# EAGLE board PREAMP_PCB_2 (EAGLE 6.3), part 1 of 2
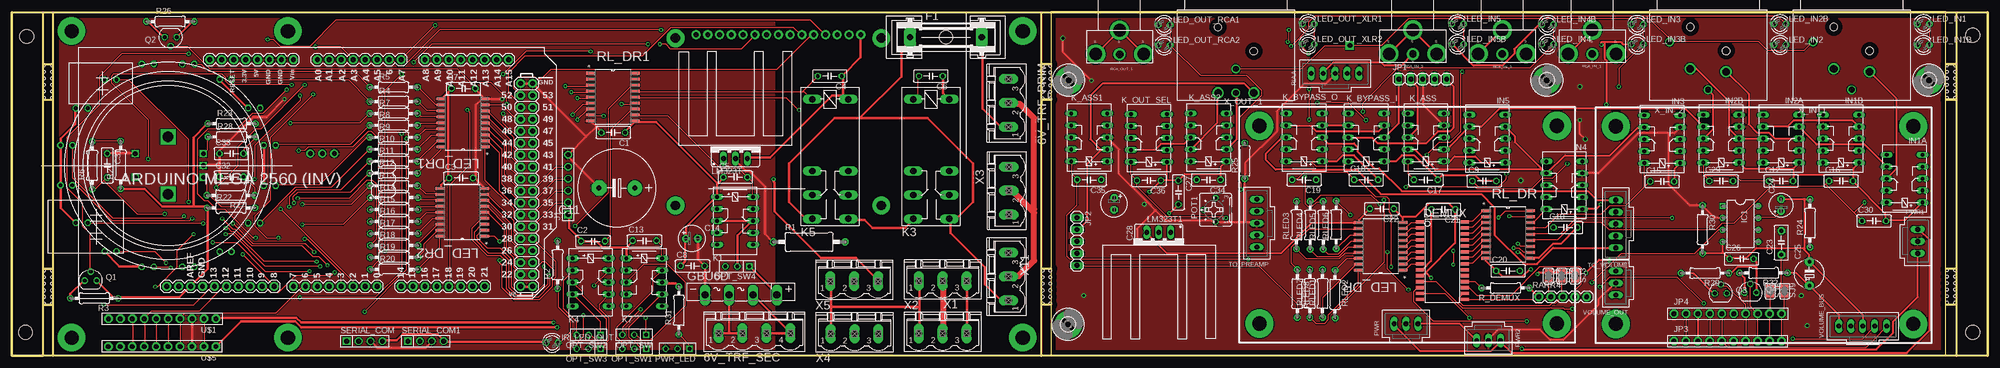
[diagram p0: board, top side]
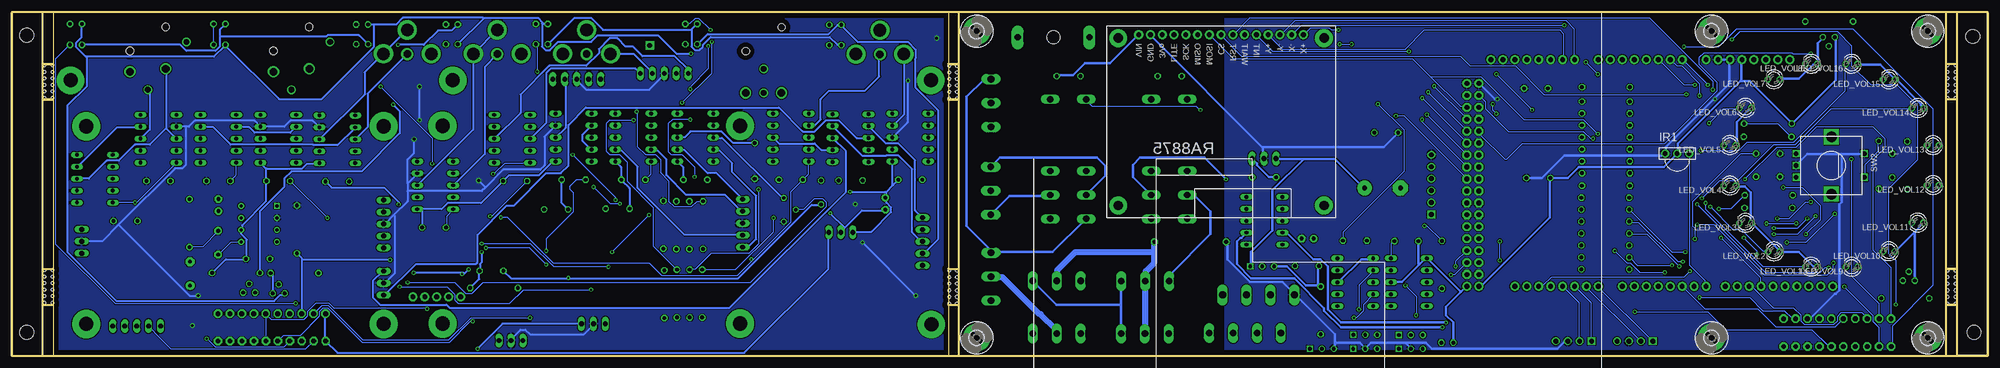
[diagram p1: board, bottom side, seen from below]

Size 419.74 x 73.2 mm. Coordinates in mm from the lower left corner, seen from the top.
Outline: 220.79,0.05 410.87,0.05
Outline: 410.87,0.05 410.87,73.2
Outline: 410.87,73.2 220.79,73.2
Outline: 220.79,73.2 220.79,0.05
Outline: 0,73.02 0,0
Outline: 419.74,0 419.74,73.02
Outline: 220.79,0.05 410.87,0.05
Outline: 410.87,0.05 410.87,73.2
Outline: 410.87,73.2 220.79,73.2
Outline: 220.79,73.2 220.79,0.05
Outline: 6.6,73.02 6.6,62.1
Outline: 6.6,62.1 6.6,54.48
Outline: 6.6,54.48 6.6,18.54
Outline: 6.6,18.54 6.6,10.92
Outline: 6.6,10.92 6.6,0 0,0
Outline: 6.6,62.1 8.76,62.1
Outline: 6.6,54.48 8.76,54.48
Outline: 6.6,18.54 8.76,18.54 6.6,18.54
Outline: 6.6,10.92 8.76,10.92 6.6,10.92
Outline: 413.13,62.1 410.97,62.1 413.13,62.1
Outline: 413.13,54.48 410.97,54.48 413.13,54.48
Outline: 413.13,10.92 410.97,10.92 413.13,10.92
Outline: 413.13,18.54 410.97,18.54 413.13,18.54
Outline: 419.74,0 413.13,0 413.13,10.92
Outline: 413.13,10.92 413.13,18.54
Outline: 413.13,18.54 413.13,54.48
Outline: 413.13,54.48 413.13,62.1
Outline: 413.13,62.1 413.13,73.02
Outline: 419.74,0 419.74,73.15 0,73.15 0,0
Outline: 419.74,0 0,0
Outline: 218.65,0 8.76,0 8.76,73.08 218.65,73.08 218.65,0
Outline: 218.69,62.1 220.85,62.1 218.69,62.1
Outline: 218.69,54.48 220.85,54.48 218.69,54.48
Outline: 220.85,10.92 218.69,10.92 220.85,10.92
Outline: 220.85,18.54 218.69,18.54 220.85,18.54
Copper layers (1*16): Top 0.035mm / dielectric 1.5mm / Bottom 0.035mm
Design rules "default *": minimum track width 10mil, minimum drill 0.4mm, track to track 8mil, track to pad 8mil, pad to pad 8mil, via to via 8mil, smd to smd 8mil, copper to edge 40mil, drill to drill 8mil, minimum pad ring 10mil, minimum via ring 8mil, stop-mask expansion 4mil, vias tented up to drill 0mil, thermal gap 10mil
Net classes: 0 default: width 0.203 mm, clearance 0.203 mm; 1 mains: width 0.508 mm, clearance 2.5 mm; 2 earth: width 1.27 mm, clearance 0.508 mm; 3 main2: width 0.508 mm, clearance 1.5 mm; 4 power: width 0.381 mm, clearance 0.203 mm
Holes 3 mm at 3.17,67.94 2.92,5.08 416.56,5.08 416.56,68.2
Holes 0.6 mm at 8.51,61.85 8.51,60.45 8.51,59.05 8.51,57.66 8.51,56.26 8.51,54.86 6.86,54.86 6.86,56.26 6.86,57.66 6.86,59.05 6.86,60.45 6.86,61.85 8.51,18.16 8.51,16.76 8.51,15.37 8.51,13.97 8.51,12.57 8.51,11.18 6.86,11.18 6.86,12.57 6.86,13.97 6.86,15.37 6.86,16.76 6.86,18.16 218.95,54.74 218.95,56.13 218.95,57.53 218.95,58.93 218.95,60.33 218.95,61.72 220.6,61.72 220.6,60.33 220.6,58.93 220.6,57.53 220.6,56.13 220.6,54.74 220.6,18.16 220.6,16.76 220.6,15.37 220.6,13.97 220.6,12.57 220.6,11.18 218.95,11.18 218.95,12.57 218.95,13.97 218.95,15.37 218.95,16.76 218.95,18.16 411.1,54.86 411.1,56.26 411.1,57.66 411.1,59.05 411.1,60.45 411.1,61.85 412.75,61.85 412.75,60.45 412.75,59.05 412.75,57.66 412.75,56.26 412.75,54.86 412.75,18.29 412.75,16.89 412.75,15.49 412.75,14.1 412.75,12.7 412.75,11.3 411.1,11.3 411.1,12.7 411.1,14.1 411.1,15.49 411.1,16.89 411.1,18.29

## Footprints (pad centres in the part's own frame; a part is rotated, then mirrored left to right if it is on the bottom)
MSTBV3 = drill 1.397 long: 1 -5.08,0; 2 0,0; 3 5.08,0
MSTBV4 = drill 1.397 long: 1 -7.62,0; 2 -2.54,0; 3 2.54,0; 4 7.62,0
C050-025X075 = drill 0.813 octagon: 1 -2.54,0; 2 2.54,0
E7,5-16 = drill 1.016 pad 3.15: + -3.81,0 | drill 1.016 pad 3.15 octagon: - 3.81,0
E2,5-6 = drill 0.813 pad 1.6: + -1.27,0 | drill 0.813 pad 1.6 octagon: - 1.27,0
C5B3 = drill 0.813 pad 1.6 octagon: 1 -2.54,0; 2 2.54,0
E2,5-5 = drill 0.813 pad 1.6: + -1.27,0 | drill 0.813 pad 1.6 octagon: - 1.27,0
E5-6 = drill 0.813 pad 1.905: + -2.54,0 | drill 0.813 pad 1.905 octagon: - 2.54,0
SO28W = smd 0.65 x 1.7: 1 -7.62,-4.78; 2 -6.35,-4.78; 3 -5.08,-4.78; 4 -3.81,-4.78; 5 -2.54,-4.78; 6 -1.27,-4.78; 7 0,-4.78; 8 1.27,-4.78; 9 2.54,-4.78; 10 3.81,-4.78; 11 5.08,-4.78; 12 6.35,-4.78; 13 7.62,-4.78; 14 8.89,-4.78; 15 8.89,4.78; 16 7.62,4.78; 17 6.35,4.78; 18 5.08,4.78; 19 3.81,4.78; 20 2.54,4.78; 21 1.27,4.78; 22 0,4.78; 23 -1.27,4.78; 24 -2.54,4.78; 25 -3.81,4.78; 26 -5.08,4.78; 27 -6.35,4.78; 28 -7.62,4.78
GSH15 = drill 1.321 pad 2.54 long: 1 -7.62,0; 2 7.62,0 | hole 2.794: 0,0
GBU4S = drill 1.499 long: + 7.62,0; - -7.62,0; AC1 2.54,0; AC2 -2.54,0
3,0-PAD = drill 3 pad 5.842: B3,0 0,0
DIL08 = drill 0.7 square: 1 -3.81,-3.81 | drill 0.7: 2 -1.27,-3.81; 3 1.27,-3.81; 4 3.81,-3.81; 5 3.81,3.81; 6 1.27,3.81; 7 -1.27,3.81; 8 -3.81,3.81
G6H2-100 = drill 0.813 long: 1 -5.08,-3.81; 5 5.08,-3.81; 6 5.08,3.81; 10 -5.08,3.81; O1 -2.54,-3.81; O2 -2.54,3.81; P1 0,-3.81; P2 0,3.81; S1 2.54,-3.81; S2 2.54,3.81
TSOP17_TB1 = drill 1 pad 1.676: GND 0,-3.81; VO 0,1.27; VS 0,-1.27
LED3MM = drill 0.813 octagon: A -1.27,0; K 1.27,0
M1X6 = drill 1.02 pad 1.632 square: 1 0,0 | drill 1.02 pad 1.632: 2 2.54,0; 3 5.08,0; 4 7.62,0; 5 10.16,0; 6 12.7,0
1X05 = drill 1.016 long: 1 -5.08,0; 2 -2.54,0; 3 0,0; 4 2.54,0; 5 5.08,0
1X10-BIG = drill 1.016 pad 1.778 octagon: 1 -11.43,0; 2 -8.89,0; 3 -6.35,0; 4 -3.81,0; 5 -1.27,0; 6 1.27,0; 7 3.81,0; 8 6.35,0; 9 8.89,0; 10 11.43,0
F4052 = drill 1.321 long: 1 -3.81,3.81; 2 -3.81,-3.81; O1 11.43,-3.81; O2 11.43,3.81; P1 16.51,-3.81; P2 16.51,3.81; S1 21.59,-3.81; S2 21.59,3.81
SOIC127P1030X265-18N = smd 1.981 x 0.559: 1 -4.674,5.08; 2 -4.674,3.81; 3 -4.674,2.54; 4 -4.674,1.27; 5 -4.674,0; 6 -4.674,-1.27; 7 -4.674,-2.54; 8 -4.674,-3.81; 9 -4.674,-5.08; 10 4.674,-5.08; 11 4.674,-3.81; 12 4.674,-2.54; 13 4.674,-1.27; 14 4.674,0; 15 4.674,1.27; 16 4.674,2.54; 17 4.674,3.81; 18 4.674,5.08
TO220S = drill 1.016 long: 1 -2.54,-2.54; 2 0,-2.54; 3 2.54,-2.54
M1X3 = drill 0.8 square: 1 0,0 | drill 0.8: 2 2.54,0; 3 5.08,0
ARDUINO_MEGA2560_INV = drill 1.016 pad 1.88: 0 63.5,2.54; 1 60.96,2.54; 2 58.42,2.54; 3 55.88,2.54; 3.3V 35.56,50.8; 4 53.34,2.54; 5 50.8,2.54; 5V 38.1,50.8; 5V. 93.98,2.54; 5V.. 96.52,2.54; 6 48.26,2.54; 7 45.72,2.54; 8 41.656,2.54; 9 39.116,2.54; 10 36.576,2.54; 11 34.036,2.54; 12 31.496,2.54; 13 28.956,2.54; 14 68.58,2.54; 15 71.12,2.54; 16 73.66,2.54; 17 76.2,2.54; 18 78.74,2.54; 19 81.28,2.54; 20 83.82,2.54; 21 86.36,2.54; A0 50.8,50.8; A1 53.34,50.8; A2 55.88,50.8; A3 58.42,50.8; A4 60.96,50.8; A5 63.5,50.8; A6 66.04,50.8; A7 68.58,50.8; A8 73.66,50.8; A9 76.2,50.8; A10 78.74,50.8; A11 81.28,50.8; A12 83.82,50.8; A13 86.36,50.8; A14 88.9,50.8; A15 91.44,50.8; AREF 23.876,2.54; GND 26.416,2.54; GND. 43.18,50.8; GND.. 40.64,50.8; GND... 93.98,45.72; GND.... 96.52,45.72; I/OREF 30.48,50.8; N/C 27.94,50.8; RESET 33.02,50.8; SCL1 18.796,2.54; SDA1 21.336,2.54; VIN 45.72,50.8 | drill 1.016 pad 1.88 octagon: 22 93.98,5.08; 23 96.52,5.08; 24 93.98,7.62; 25 96.52,7.62; 26 93.98,10.16; 27 96.52,10.16; 28 93.98,12.7; 29 96.52,12.7; 30 93.98,15.24; 31 96.52,15.24; 32 93.98,17.78; 33 96.52,17.78; 34 93.98,20.32; 35 96.52,20.32; 36 93.98,22.86; 37 96.52,22.86; 38 93.98,25.4; 39 96.52,25.4; 40 93.98,27.94; 41 96.52,27.94; 42 93.98,30.48; 43 96.52,30.48; 44 93.98,33.02; 45 96.52,33.02; 46 93.98,35.56; 47 96.52,35.56; 48 93.98,38.1; 49 96.52,38.1; 50 93.98,40.64; 51 96.52,40.64; 52 93.98,43.18; 53 96.52,43.18
B25P = drill 0.7 octagon: 1 -2.54,0; 2 0,2.54; 3 2.54,0
70543-03 = drill 1.016 long: 1 -2.54,0; 2 0,0; 3 2.54,0
SOT54E = drill 0.813 octagon: D -1.27,0; G 0,1.905; S 1.27,0
0411/15 = drill 0.914 octagon: 1 -7.62,0; 2 7.62,0
0207/10 = drill 0.813 octagon: 1 -5.08,0; 2 5.08,0
0207/7 = drill 0.813 octagon: 1 -3.81,0; 2 3.81,0
RTH025W = drill 0.813 octagon: 1 -5.08,0; 2 5.08,0
1X05' = drill 1.016 pad 1.88: 1 0,0; 2 2.54,0; 3 5.08,0; 4 7.62,0; 5 10.16,0
MONO_JACK = drill 2.667 pad 4.064: SLEEVE 7.62,0; SLEEVE1 -2.54,0; SLEEVE2 2.54,-5.08 | drill 1.575 pad 2.54: TIP 2.54,0.064
70543-05 = drill 1.016 long: 1 -5.08,0; 2 -2.54,0; 3 0,0; 4 2.54,0; 5 5.08,0
M1X4 = drill 1.02 pad 1.632 square: 1 0,0 | drill 1.02 pad 1.632: 2 2.54,0; 3 5.08,0; 4 7.62,0
SJ = smd 1.168 x 1.6: 1 -0.762,0; 2 0.762,0
ALPS_EC12E_SW = drill 1 square: A -2.5,-7.5; B 2.5,-7.5; C 0,-7.5; D -2.5,7; E 2.5,7 | drill 2.2 square: GND1 -6.1,0; GND2 6.1,0
CON_PAD_SQUARE_1.02MM = drill 1.02 pad 1.81 square: P 0,0
RA8875 = drill 1 pad 1.93: 3VO 11.85,1.8; CS 24.35,1.8; GND 9.35,1.8; INT 31.85,1.8; LITE 14.35,1.8; MISO 19.35,1.8; MOSI 21.85,1.8; RST 26.85,1.8; SCK 16.85,1.8; VIN 6.85,1.8; WAIT 29.35,1.8; X+ 41.85,1.8; X- 39.35,1.8; Y+ 34.35,1.8; Y- 36.85,1.8 | drill 2 pad 3.81: P$1 2.5,2.5; P$2 46.2,2.5; P$3 2.5,38.1; P$4 46.2,38.1
UGS = drill 3 pad 6: P$1 23.165,-12.497; P$2 23.19,29.54; P$3 -40.005,29.54; P$4 -40.005,-12.497
NC3FAH2 = drill 1.6: 1 -3.81,0.635; 2 3.81,0 | drill 1.2: 3 0,-3.815; G -8.25,6.355 | hole 1.6: -3.81,9.525; 3.81,4.445
NC3MBH = drill 1.6: 1 3.81,0; 2 -3.81,0 | drill 1.2: 3 0,0; G 0,5.08 | hole 1.6: -3.81,13.97; 3.81,8.89

## Placement (x,y rotation side)
6V_TRF_PRIM  5V_TRF_PRIM  [MSTBV3]  211.73,53.8 90 top
6V_TRF_SEC  6V_TRF_SEC  [MSTBV4]  157.77,4.86 0 top
C1  100n  [C050-025X075]  127.76,47.5 180 top
C2  100n  [C050-025X075]  123.47,24.41 0 top
C3  100n  [C050-025X075]  95.44,37.85 0 top
C4  100n  [C050-025X075]  173.77,59.53 180 top
C5  100n  [C050-025X075]  153.69,38.02 0 top
C6  100n  [C050-025X075]  195.23,59.53 180 top
C7  100n  [C050-025X075]  95.95,56.9 0 top
C8  100n  [C050-025X075]  144.61,19.13 0 top
C9  100n  [C050-025X075]  312.8,37.21 0 top
C10  100n  [C050-025X075]  330.04,27.31 0 top
C11  4700µ  [E7,5-16]  128.54,35.72 180 top
C12  100n  [C050-025X075]  375.85,37.21 0 top
C13  100n  [C050-025X075]  134.41,24.51 0 top
C14  470µ  [E2,5-6]  144.46,24.98 0 top
C15  100n  [C050-025X075]  350.58,37.09 0 top
C16  100n  [C050-025X075]  388.58,37.21 0 top
C17  100n  [C050-025X075]  300.38,37.47 180 top
C18  100n  [C050-025X075]  287.71,37.47 0 top
C19  100n  [C050-025X075]  274.53,37.47 180 top
C20  100n  [C050-025X075]  317.83,18.1 0 top
C21  100n  [C050-025X075]  304.11,31.18 180 top
C22  100n  [C050-025X075]  291.03,31.31 180 top
C23  47nF  [C5B3]  375.9,24.09 90 top
C24  1µF  [E2,5-5]  375.85,32.09 90 top
C25  100µF  [E5-6]  381.87,17.5 90 top
C26  100n  [C050-025X075]  367.45,20.66 0 top
C27  100n  [C050-025X075]  247.82,34.77 270 top
C28  470µ  [E2,5-6]  234.17,32.38 270 top
C29  100n  [C050-025X075]  363.12,37.21 0 top
C30  100n  [C050-025X075]  395.59,28.7 0 top
C31  100n  [C050-025X075]  20.27,40.51 270 top
C32  100n  [C050-025X075]  46.67,38.11 0 top
C33  100n  [C050-025X075]  46.67,43.03 0 top
C34  100n  [C050-025X075]  254.24,37.47 180 top
C35  100n  [C050-025X075]  228.87,37.47 180 top
C36  100n  [C050-025X075]  241.55,37.34 180 top
DEMUX  23S17  [SO28W]  303.86,20.89 270 top
F1  300mA  [GSH15]  198.44,67.77 0 top
GBU6D  6A  [GBU4S]  154.89,12.98 0 top
H1  MOUNT-PAD-ROUND3.0  [3,0-PAD]  214.76,69.09 0 bottom
H2  MOUNT-PAD-ROUND3.0  [3,0-PAD]  224.37,6.73 0 top
H3  MOUNT-PAD-ROUND3.0  [3,0-PAD]  12.73,69.09 0 bottom
H5  MOUNT-PAD-ROUND3.0  [3,0-PAD]  326.05,58.62 0 top
H6  MOUNT-PAD-ROUND3.0  [3,0-PAD]  58.67,3.87 0 bottom
H7  MOUNT-PAD-ROUND3.0  [3,0-PAD]  214.76,3.87 0 bottom
H8  MOUNT-PAD-ROUND3.0  [3,0-PAD]  58.67,69.09 0 bottom
H9  MOUNT-PAD-ROUND3.0  [3,0-PAD]  12.73,3.87 0 bottom
H11  MOUNT-PAD-ROUND3.0  [3,0-PAD]  407.24,58.64 0 top
H15  MOUNT-PAD-ROUND3.0  [3,0-PAD]  224.5,58.62 0 top
IC1  LM386  [DIL08]  367.2,28.09 270 top
IN1A  IN1A  [G6H2-100]  402.07,37.7 90 top
IN1B  IN1B  [G6H2-100]  388.58,46.21 90 top
IN2A  IN2A  [G6H2-100]  375.85,46.21 90 top
IN2B  IN2B  [G6H2-100]  363.12,46.21 90 top
IN3  IN3  [G6H2-100]  350.58,46.09 90 top
IN4  IN4  [G6H2-100]  329.78,36.31 90 top
IN5  IN5  [G6H2-100]  313.43,46.21 90 top
IR1  IR  [TSOP17_TB1]  64.7,43.07 270 bottom
IR_LED_OUT  IR out  [LED3MM]  114.79,2.84 0 top
J1  CON_HEADER_1X06-PTH  [M1X6]  118.19,30.09 90 top
JP1  OUT/IN SELECTED  [1X05]  299.72,58.88 0 top
JP2  OUTPUT  [1X05]  226.26,24.33 270 top
JP3  PINHD-1X10  [1X10-BIG]  364.49,3.17 0 top
JP4  PINHD-1X10  [1X10-BIG]  364.52,8.99 0 top
K1  G6H2-100  [G6H2-100]  153.65,28.75 270 top
K3  4052  [F4052]  195.33,50.77 270 top
K4  G6H2-100  [G6H2-100]  122.96,15.68 270 top
K5  4052  [F4052]  173.87,50.77 270 top
K7  G6H2-100  [G6H2-100]  134.35,15.68 270 top
K_ASS  K_ASS_I  [G6H2-100]  300.38,46.47 90 top
K_ASS1  K_ASS_O_GND  [G6H2-100]  228.87,46.47 90 top
K_ASS2  K_ASS_O  [G6H2-100]  254.24,46.47 90 top
K_BYPASS_I  BYPASS_I  [G6H2-100]  287.71,46.47 90 top
K_BYPASS_O  BYPASS_O  [G6H2-100]  274.53,46.47 90 top
K_OUT_SEL  K_OUT_SEL  [G6H2-100]  241.55,46.36 90 top
LED_DR  2803  [SOIC127P1030X265-18N]  290.78,23.31 180 top
LED_DR1  2803  [SOIC127P1030X265-18N]  95.88,49.59 180 top
LED_DR2  2803  [SOIC127P1030X265-18N]  95.69,30.54 180 top
LED_IN1  [LED3MM]  406.08,70.61 0 top
LED_IN1B  [LED3MM]  406.08,66.17 0 top
LED_IN2  [LED3MM]  375.6,66.17 0 top
LED_IN2B  [LED3MM]  375.6,70.61 0 top
LED_IN3  [LED3MM]  345.31,70.48 0 top
LED_IN3B  [LED3MM]  345.31,66.29 0 top
LED_IN4  [LED3MM]  326.26,66.29 0 top
LED_IN4B  [LED3MM]  326.26,70.48 0 top
LED_IN5  [LED3MM]  307.15,70.61 0 top
LED_IN5B  [LED3MM]  307.15,66.29 0 top
LED_OUT_RCA1  [LED3MM]  244.79,70.42 0 top
LED_OUT_RCA2  [LED3MM]  244.79,66.1 0 top
LED_OUT_XLR1  [LED3MM]  275.4,70.61 0 top
LED_OUT_XLR2  [LED3MM]  275.4,66.29 0 top
LED_VOL1  [LED3MM]  37.5,18.94 180 bottom
LED_VOL2  [LED3MM]  45.41,22.2 180 bottom
LED_VOL3  [LED3MM]  51.48,28.26 180 bottom
LED_VOL4  [LED3MM]  54.78,36.21 180 bottom
LED_VOL5  [LED3MM]  54.78,44.81 180 bottom
LED_VOL6  [LED3MM]  51.49,52.75 180 bottom
LED_VOL7  [LED3MM]  45.42,58.81 180 bottom
LED_VOL8  [LED3MM]  37.49,62.09 180 bottom
LED_VOL9  [LED3MM]  28.9,18.93 180 bottom
LED_VOL10  [LED3MM]  20.99,22.21 180 bottom
LED_VOL11  [LED3MM]  14.89,28.32 180 bottom
LED_VOL12  [LED3MM]  11.61,36.3 180 bottom
LED_VOL13  [LED3MM]  11.63,44.8 180 bottom
LED_VOL14  [LED3MM]  14.88,52.68 180 bottom
LED_VOL15  [LED3MM]  20.97,58.79 180 bottom
LED_VOL16  [LED3MM]  28.91,62.09 180 bottom
LM323T  5V REG  [TO220S]  153.73,44.52 0 top
LM323T1  5V REG  [TO220S]  243.63,23.75 180 top
OPT_SW  CON_HEADER_1X03-PTH  [M1X3]  134.77,4.49 180 top
OPT_SW1  CON_HEADER_1X03-PTH  [M1X3]  134.77,1.55 180 top
OPT_SW2  CON_HEADER_1X03-PTH  [M1X3]  125.09,4.46 180 top
OPT_SW3  CON_HEADER_1X03-PTH  [M1X3]  125.09,1.54 180 top
OPT_SW4  V_RECT_-_5V_OUT  [M1X3]  156.66,19.07 180 top
PCB2  ARDUINO_MEGA2560_INV  [ARDUINO_MEGA2560_INV]  14.11,12.24 0 top
POT1  500k  [B25P]  255.72,31.08 90 top
PWR  PWR  [70543-03]  296.16,6.86 0 top
PWR1  PWR  [70543-03]  404.88,24.38 270 top
PWR2  PWR  [70543-03]  313.69,3.3 180 top
PWR_LED  CON_HEADER_1X03-PTH  [M1X3]  144,1.55 180 top
Q1  BS250  [SOT54E]  16.75,16.04 0 top
Q2  BS250  [SOT54E]  33.75,67.81 180 top
Q3  BS250  [SOT54E]  363.02,13.31 0 top
Q4  BS250  [SOT54E]  369.32,13.46 0 top
R1  10R 1W  [0411/15]  169.39,24.25 0 top
R2  330  [0207/10]  115.94,19.41 90 top
R3  10k PWM  [0207/10]  17.52,12.28 180 top
R4  1k  [0207/10]  81.1,54.12 0 top
R5  1k  [0207/10]  81.1,57.17 0 top
R6  10k  [0207/10]  17.08,40.52 90 top
R7  1k  [0207/10]  81.1,51.58 0 top
R8  1k  [0207/10]  81.1,49.04 0 top
R9  1k  [0207/10]  81.1,46.5 0 top
R10  1k  [0207/10]  81.1,43.96 0 top
R11  1k  [0207/10]  81.1,41.42 0 top
R12  1k  [0207/10]  81.1,38.88 0 top
R13  1k  [0207/10]  81.1,36.21 0 top
R14  1k  [0207/10]  81.23,33.67 0 top
R15  1k  [0207/10]  81.23,31.13 0 top
R16  1k  [0207/10]  81.23,28.59 0 top
R17  1k  [0207/10]  81.23,26.05 0 top
R18  1k  [0207/10]  81.23,23.51 0 top
R19  1k  [0207/10]  81.23,20.97 0 top
R20  1k  [0207/10]  81.23,18.43 0 top
R21  10k  [0207/10]  23.12,40.64 90 top
R22  10k  [0207/10]  46.57,31.5 0 top
R23  10k  [0207/10]  46.7,49.4 0 top
R24  10  [0207/10]  381.97,28.24 90 top
R25  500k  [0207/7]  261.92,41.48 90 top
R26  10k PWM  [0207/10]  33.7,71.12 0 top
R27  10k  [0207/10]  46.5,34.17 180 top
R28  10k  [0207/10]  46.75,46.6 0 top
R29  10k PWM  [0207/10]  359.66,17.63 180 top
R30  opt GND link  [0207/10]  359.16,26.92 270 top
R31  1k  [0207/10]  141.71,9.68 90 top
R32  10k PWM  [0207/10]  372.11,17.65 180 top
R_DEMUX  10k  [RTH025W]  317.3,14.46 180 top
RARR4  10k  [1X05']  324.38,12.55 0 top
RCA_IN_1  IN1  [MONO_JACK]  338.26,64.26 180 top
RCA_IN_2  IN2  [MONO_JACK]  319.15,64.26 180 top
RCA_IN_3  IN3_RIAA  [MONO_JACK]  300.16,64.26 180 top
RCA_OUT_1  OUT1  [MONO_JACK]  237.87,64.2 180 top
RIAA  TO_RIAA  [70543-05]  281.11,60.07 0 top
RL_DR  2803  [SOIC127P1030X265-18N]  317.83,25.85 0 top
RL_DR1  2803  [SOIC127P1030X265-18N]  127.7,55.05 0 top
RLED1  45 LED  [0207/10]  278.44,13.27 90 top
RLED2  45 LED  [0207/10]  281.1,13.15 270 top
RLED3  45 LED  [0207/10]  272.91,27.85 90 top
RLED4  45 LED  [0207/10]  275.81,27.81 90 top
RLED5  45 LED  [0207/10]  278.58,27.81 90 top
RLED6  45 LED  [0207/10]  281.33,27.91 90 top
RLED7  45 LED  [0207/10]  275.73,13.27 90 top
RLED8  45 LED  [0207/10]  273.07,13.27 270 top
SERIAL_COM  CON_HEADER_1X04  [M1X4]  71.13,3.15 0 top
SERIAL_COM1  CON_HEADER_1X04  [M1X4]  84.13,3.15 0 top
SJ1  A0  [SJ]  326.41,17.03 270 top
SJ2  A1  [SJ]  329.22,17.03 270 top
SJ3  A2  [SJ]  332.04,17.03 270 top
SJ8  A0  [SJ]  373.51,13.83 270 top
SJ9  A0  [SJ]  376.56,13.83 270 top
SW2  EC12E_SW  [ALPS_EC12E_SW]  33.2,40.51 270 bottom
T1  PAD_TERMINAL-1.02MM_SQUARE  [CON_PAD_SQUARE_1.02MM]  284.23,66.04 0 top
TO_PREAMP  TO_PREAMP  [70543-05]  264.47,28.24 90 top
TO_VOLUME  TO_VOLUME  [70543-05]  340.74,28.07 90 top
U$1  RELAY BOARD  [1X10-BIG]  31.95,7.92 180 top
U$2  HEATSINK  [HEATSINK]  153.73,44.72 180 top
U$3  RA8875  [RA8875]  187.2,70.1 180 top
U$4  5"TFT  [5_TFT]  202.69,73.02 180 top
U$5  RELAY BOARD  [1X10-BIG]  31.94,2.03 180 top
U$6  UGS  [UGS]  305.05,19.39 0 top
U$7  HEATSINK  [HEATSINK]  243.65,23.65 0 top
U$8  UGS  [UGS]  380.75,19.3 0 top
VOLUME_BUS  VOLUME_BUS  [70543-05]  393.19,6.35 0 top
VOLUME_OUT  VOLUME_OUT  [70543-03]  340.74,15.49 90 top
X1  220V PR13  [MSTBV3]  197.75,4.79 0 top
X2  220V PR14  [MSTBV3]  197.75,15.97 0 top
X3  220V PR2  [MSTBV3]  211.79,35.15 90 top
X4  220V PR11  [MSTBV3]  179.02,4.73 0 top
X5  220V PR12  [MSTBV3]  178.96,15.91 0 top
X11  220V AC IN  [MSTBV3]  211.73,16.89 90 top
X_IN_1  X_IN_1  [NC3FAH2]  390.84,60.45 0 top
X_IN_2  X_IN_2  [NC3FAH2]  360.36,60.45 0 top
X_OUT_1  X_OUT  [NC3MBH]  260.03,55.94 0 top

## Library data of the parts
6V_TRF_PRIM X1-X5 X11 = con-phoenix-508; MPN: MSTBV 2,5/3-GF-5.08; OC_FARNELL: 1792793; OC_NEWARK: 69R9846
6V_TRF_SEC = con-phoenix-508; MPN: MSTBV 2,5/4-GF-5.08; OC_FARNELL: 1792794; OC_NEWARK: 69R9847
C1-C22 C24-C36 R1-R32 RLED1-RLED8 = rcl
C23 = capacitor-wima
DEMUX = microchip; MF: MICROCHIP; MPN: MCP23S17-E/SO; OC_FARNELL: unknown; OC_NEWARK: 31K2950
F1 = fuse; MPN: 64900001039; OC_FARNELL: 1271673; OC_NEWARK: 02P0318
GBU6D = rectifier
H1-H3 H5-H9 H11 H15 = holes
IC1 = gm-ics
IN1A IN1B IN2A IN2B IN3-IN5 K1 K3-K5 K7 K_ASS K_ASS1 K_ASS2 K_BYPASS_I K_BYPASS_O K_OUT_SEL = relay; OC_FARNELL: unknown; OC_NEWARK: unknown
IR1 = telefunken; OC_FARNELL: unknown; OC_NEWARK: unknown
IR_LED_OUT LED_IN1 LED_IN1B LED_IN2 LED_IN2B LED_IN3 LED_IN3B LED_IN4 LED_IN4B LED_IN5 LED_IN5B LED_OUT_RCA1 LED_OUT_RCA2 LED_OUT_XLR1 LED_OUT_XLR2 LED_VOL1-LED_VOL16 = led; MF: VISHAY SEMICONDUCTOR; OC_FARNELL: 1612435
J1 OPT_SW OPT_SW1-OPT_SW4 PWR_LED R_DEMUX SERIAL_COM SERIAL_COM1 = dp_devices.v6
JP1 JP2 = pinhead
JP3 JP4 U$1 U$5 = adafruit
LED_DR LED_DR1 LED_DR2 RL_DR RL_DR1 = uln-udn; MPN: ULN2803ADWR; OC_FARNELL: 1652420; OC_NEWARK: 87H4769; PACKAGE: SOIC-18; SUPPLIER: TEXAS INSTRUMENTS
LM323T LM323T1 = v-reg
PCB2 = E14_Arduino_revB
POT1 = gm-pots
PWR PWR1 PWR2 RIAA TO_PREAMP TO_VOLUME VOLUME_BUS VOLUME_OUT = con-molex; OC_FARNELL: unknown; OC_NEWARK: unknown
Q1-Q4 = transistor-small-signal
RARR4 = SparkFun
RCA_IN_1-RCA_IN_3 RCA_OUT_1 = 00_steve
SJ1-SJ3 SJ8 SJ9 = jumper
SW2 = switch-alps; MPN: EC12E2424407; OC_FARNELL: 1520813; OC_NEWARK: 74M1068
T1 = dp_devices
U$2-U$4 U$6-U$8 = gael
X_IN_1 X_IN_2 = con-neutrik_ag; MPN: NC3FAH2; OC_FARNELL: unknown; OC_NEWARK: 27B4208
X_OUT_1 = con-neutrik_ag; MF: NEUTRIK; MPN: NC3MBH; OC_FARNELL: unknown; OC_NEWARK: 91F3470

## Nets
+5V [power]: C1.1 C2.1 C3.1 C4.1 C5.1 C6.1 C7.1 C8.1 C13.1 C14.+ IR1.VS IR_LED_OUT.A J1.1 K1.1 K3.1 K4.1 K4.P2 K5.1 K7.1 K7.P2 LED_DR1.10 LED_DR2.10 LM323T.3 OPT_SW4.3 PCB2.5V PCB2.5V. PCB2.5V.. PCB2.AREF Q1.S Q2.S R3.1 R21.1 R22.1 R23.1 R26.1 R31.2 RL_DR1.10 SERIAL_COM1.4 SERIAL_COM.4 U$3.VIN
+5V1 [power]: C9.2 C10.2 C12.2 C15.2 C16.2 C17.1 C18.2 C19.1 C20.2 C21.2 C22.2 C25.+ C26.2 C27.1 C28.+ C29.2 C30.2 C34.1 C35.1 C36.1 DEMUX.9 IC1.6 IN1A.1 IN1B.1 IN2A.1 IN2B.1 IN3.1 IN4.1 IN5.1 K_ASS1.1 K_ASS2.1 K_ASS.1 K_BYPASS_I.1 K_BYPASS_O.1 K_OUT_SEL.1 LED_DR.10 LM323T1.3 Q3.S Q4.S R29.1 R32.1 R_DEMUX.1 RARR4.1 RL_DR.10 VOLUME_BUS.1
+5V_RAW1 [power]: JP3.1 JP4.1 LM323T1.1
BYPASS+ [power]: K_BYPASS_I.S1 K_BYPASS_O.S2
BYPASS- [power]: K_BYPASS_I.S2 K_BYPASS_O.S1
EARTH [earth]: 6V_TRF_PRIM.2 R1.2 X1.2 X2.2 X3.2 X4.2 X5.2 X11.2
EARTH1: T1.P X_IN_1.G X_IN_2.G X_OUT_1.G
GND [power]: C1.2 C3.2 C7.2 C8.2 C11.- C14.- C31.1 C32.1 C33.1 GBU6D.- IR1.GND J1.6 LED_DR1.9 LED_DR2.9 LM323T.2 OPT_SW1.2 OPT_SW3.2 PCB2.GND. PCB2.GND.. PCB2.GND... PCB2.GND.... PWR_LED.3 R1.1 RL_DR1.9 SERIAL_COM1.3 SERIAL_COM.3 SW2.C SW2.D U$1.3 U$3.GND U$5.3
GND1 [power]: C20.1 C21.1 C22.1 C24.- C25.- C26.1 C27.2 C28.- DEMUX.10 IC1.4 JP3.3 JP4.3 LED_DR.9 LM323T1.2 R24.2 R30.2 RL_DR.9 SJ1.1 SJ2.1 SJ3.1 VOLUME_BUS.3
GND_AUDIO [power]: IC1.2 IN1B.S2 IN2B.S1 IN3.S1 IN4.S1 JP1.3 K_ASS1.P1 K_ASS.S1 POT1.1 PWR1.2 PWR2.2 PWR.2 R25.1 R30.1 RIAA.3 TO_PREAMP.3 TO_VOLUME.3 VOLUME_OUT.2
GND_IN_RIAA [power]: RCA_IN_3.SLEEVE RCA_IN_3.SLEEVE1 RCA_IN_3.SLEEVE2 RIAA.4
GND_OUT_ASSYM [power]: K_ASS1.S1 RCA_OUT_1.SLEEVE RCA_OUT_1.SLEEVE1 RCA_OUT_1.SLEEVE2
GND_OUT_SYM [power]: JP2.2 K_ASS1.O1 X_OUT_1.1
IN_SYM+ [power]: IN1A.S2 IN2A.S1 IN3.S2 IN4.S2 IN5.S1 K_ASS.O2 K_ASS.S2
IN_SYM- [power]: IN1A.S1 IN1B.S1 IN2A.S2 IN2B.S2 IN5.S2 K_ASS.O1
IN_VOL+ [power]: K_BYPASS_O.P2 POT1.3 TO_VOLUME.1
IN_VOL- [power]: K_BYPASS_O.P1 R25.2 TO_VOLUME.5
IO22: LED_DR2.5 PCB2.22
IO23: LED_DR2.4 PCB2.23
IO24: LED_DR2.6 PCB2.24
IO25: LED_DR2.3 PCB2.25
IO26: LED_DR2.7 PCB2.26
IO27: LED_DR2.2 PCB2.27
IO28: LED_DR2.8 PCB2.28
IO29: LED_DR2.1 PCB2.29
IO30: LED_DR1.1 PCB2.30
IO31: J1.2 PCB2.31
IO32: LED_DR1.2 PCB2.32
IO33: J1.3 PCB2.33
IO34: LED_DR1.3 PCB2.34
IO35: J1.4 PCB2.35
IO36: LED_DR1.4 PCB2.36
IO37: J1.5 PCB2.37
IO38: LED_DR1.5 PCB2.38
IO39: PCB2.39 RL_DR1.8
IO40: LED_DR1.6 PCB2.40
IO41: PCB2.41 RL_DR1.7
IO42: LED_DR1.7 PCB2.42
IO43: PCB2.43 RL_DR1.6
IO44: PCB2.44 Q2.G
IO45: PCB2.45 RL_DR1.5
IO46: PCB2.46 Q1.G
IO47: PCB2.47 RL_DR1.4
IO48: LED_DR1.8 PCB2.48
IO49: PCB2.49 RL_DR1.3
IR_IN: IR1.VO PCB2.7
LED1: LED_IN2.K LED_IN2B.K RLED5.2
LED3: LED_IN3.K LED_IN3B.K RLED4.2
LED4: LED_IN4.K LED_IN4B.K RLED3.2
LED5: LED_IN5.K LED_IN5B.K RLED2.2
LED6: LED_OUT_XLR1.K LED_OUT_XLR2.K RLED1.2
LED7: LED_OUT_RCA1.K LED_OUT_RCA2.K RLED7.2
LED8: LED_IN1.K LED_IN1B.K RLED6.2
LED9: JP2.5 RLED8.2
LED_COMMON_1 [power]: LED_VOL1.A LED_VOL2.A LED_VOL3.A LED_VOL4.A LED_VOL5.A LED_VOL6.A LED_VOL7.A LED_VOL8.A Q2.D R26.2
LED_COMMON_2 [power]: LED_VOL9.A LED_VOL10.A LED_VOL11.A LED_VOL12.A LED_VOL13.A LED_VOL14.A LED_VOL15.A LED_VOL16.A Q1.D R3.2
LED_PWM_5V [power]: JP2.4 LED_IN1.A LED_IN2.A LED_IN3.A LED_IN4.A LED_IN5.A LED_OUT_RCA1.A LED_OUT_XLR2.A Q3.D R29.2
LED_PWM_5V_2 [power]: LED_IN1B.A LED_IN2B.A LED_IN3B.A LED_IN4B.A LED_IN5B.A LED_OUT_RCA2.A LED_OUT_XLR1.A Q4.D R32.2
MAINS_L [mains]: F1.1 K3.S2 K5.S1 X11.1
MAINS_N [mains]: 6V_TRF_PRIM.3 K3.S1 K5.S2 X11.3
MISO: PCB2.50 U$3.MISO
MOSI: PCB2.51 U$1.2 U$3.MOSI U$5.2
MOSI1: DEMUX.13 JP3.2 JP4.2 VOLUME_BUS.2
MUX_CS: PCB2.5 U$1.6 U$5.6
MUX_CS1: DEMUX.11 JP3.6 JP4.6
N$1: K4.P1 OPT_SW2.2
N$2: R2.2 RL_DR1.16
N$3: IR_LED_OUT.K R2.1
N$4: LED_VOL1.K R12.1
N$5: PCB2.14 SERIAL_COM.1
N$6: PCB2.15 SERIAL_COM.2
N$7: LED_DR1.11 R5.2
N$8: K4.S1 OPT_SW2.1
N$9: K4.O1 OPT_SW2.3
N$10: LED_VOL2.K R11.1
N$11: R6.2 R21.2 SW2.E
N$12: LED_VOL3.K R10.1
N$13: LED_VOL4.K R9.1
N$14: LED_VOL5.K R8.1
N$15: LED_VOL6.K R7.1
N$16: LED_VOL7.K R4.1
N$17: LED_VOL8.K R5.1
N$18: LED_DR2.11 R13.2
N$19: LED_DR2.12 R14.2
N$20 [power]: IN3.P1 RCA_IN_1.SLEEVE RCA_IN_1.SLEEVE1 RCA_IN_1.SLEEVE2
N$21: LED_DR2.13 R15.2
N$22: LED_DR2.14 R16.2
N$23: LED_DR2.15 R17.2
N$24: LED_DR2.16 R18.2
N$25: LED_DR2.17 R19.2
N$26: LED_DR2.18 R20.2
N$27: K7.S2 OPT_SW1.1
N$28: R22.2 R27.2 SW2.B
N$29: LED_DR1.12 R4.2
N$30 [power]: IN1A.P2 X_IN_1.2
N$31: LED_DR1.13 R7.2
N$32: K7.P1 OPT_SW.2
N$33: LED_DR1.14 R8.2
N$34: LED_DR1.15 R9.2
N$35: LED_DR1.16 R10.2
N$36: LED_DR1.17 R11.2
N$37: LED_DR1.18 R12.2
N$38 [power]: 6V_TRF_SEC.3 6V_TRF_SEC.4 GBU6D.AC1
N$39 [power]: 6V_TRF_SEC.1 6V_TRF_SEC.2 GBU6D.AC2
N$40: K7.O2 OPT_SW1.3
N$41: LED_VOL9.K R13.1
N$42: LED_VOL10.K R14.1
N$43: LED_VOL11.K R15.1
N$44 [power]: IN1B.P1 X_IN_1.3
N$45: DEMUX.8 LED_DR.1
N$46: DEMUX.7 LED_DR.2
N$47: DEMUX.6 LED_DR.3
N$48: DEMUX.5 LED_DR.4
N$49: DEMUX.4 LED_DR.5
N$50: DEMUX.3 LED_DR.6
N$51: DEMUX.2 LED_DR.7
N$52: DEMUX.1 LED_DR.8
N$53: LED_VOL12.K R16.1
N$54: LED_VOL13.K R17.1
N$55: LED_VOL14.K R18.1
N$56 [main2]: K3.P1 X3.3
N$57: LED_VOL15.K R19.1
N$58: LED_VOL16.K R20.1
N$59: K7.S1 OPT_SW.1
N$60: PCB2.16 SERIAL_COM1.1
N$61: PCB2.17 SERIAL_COM1.2
N$62: R23.2 R28.1 SW2.A
N$63: DEMUX.17 RARR4.4 SJ3.2
N$64: K4.S2 OPT_SW3.1
N$65 [main2]: K3.P2 X3.1
N$66 [power]: IN4.P1 RCA_IN_2.SLEEVE RCA_IN_2.SLEEVE1 RCA_IN_2.SLEEVE2
N$67 [power]: IN2A.P1 X_IN_2.2
N$68 [power]: IN2B.P2 X_IN_2.3
N$69: DEMUX.16 RARR4.3 SJ2.2
N$70: DEMUX.15 RARR4.2 SJ1.2
N$71 [power]: IN3.P2 RCA_IN_1.TIP
N$72 [power]: IN4.P2 RCA_IN_2.TIP
N$73 [mains]: 6V_TRF_PRIM.1 F1.2
N$74: K7.O1 OPT_SW.3
N$75: PCB2.A0 U$1.9
N$76: DEMUX.18 R_DEMUX.2
N$77: C23.2 R24.1
N$78: IC1.3 POT1.2
N$79: C24.+ IC1.7
N$80 [power]: IN2A.P2 IN2B.P1 X_IN_2.1
N$81 [power]: IN1A.P1 IN1B.P2 X_IN_1.1
N$82: DEMUX.21 RL_DR.8
N$83: DEMUX.22 RL_DR.7
N$84: PCB2.A1 U$1.10
N$85: PCB2.A2 U$5.9
N$86: PCB2.A3 U$5.10
N$87: DEMUX.23 RL_DR.6
N$88: DEMUX.24 RL_DR.5
N$89: DEMUX.25 RL_DR.4
N$90: DEMUX.26 RL_DR.3
N$91: DEMUX.27 RL_DR.2
N$92: DEMUX.28 RL_DR.1
N$93 [power]: K_ASS2.O2 X_OUT_1.2
N$94 [power]: K_ASS2.O1 X_OUT_1.3
N$95 [power]: K_ASS2.S2 RCA_OUT_1.TIP
N$96: JP3.9 JP4.9 SJ8.2
N$97: JP3.10 JP4.10 SJ9.2
N$99 [power]: PWR1.1 PWR2.1 PWR.1
N$100 [power]: PWR1.3 PWR2.3 PWR.3
N$101: LED_DR.15 RLED3.1
N$102: LED_DR.14 RLED4.1
N$103: LED_DR.13 RLED5.1
N$104: LED_DR.12 RLED6.1
N$105: LED_DR.17 RLED1.1
N$106: LED_DR.18 RLED7.1
N$107: LED_DR.16 RLED2.1
N$123: K4.O2 OPT_SW3.3
N$138: PWR_LED.1 R31.1
N$139 [mains]: K5.P1 X1.1 X2.1 X4.1 X5.1
N$141 [main2]: K5.P2 X1.3 X2.3 X4.3 X5.3
OUT_EXT+ [power]: JP2.1 K_OUT_SEL.S2
OUT_EXT- [power]: JP2.3 K_OUT_SEL.S1
OUT_INT+ [power]: K_ASS2.P2 K_OUT_SEL.O2
OUT_INT- [power]: K_ASS2.P1 K_OUT_SEL.O1
OUT_VOL+ [power]: K_OUT_SEL.P2 VOLUME_OUT.1
OUT_VOL- [power]: K_OUT_SEL.P1 VOLUME_OUT.3
PREAMP1_IN+ [power]: K_BYPASS_I.O1 TO_PREAMP.2
PREAMP1_IN- [power]: K_BYPASS_I.O2 TO_PREAMP.4
PREAMP1_OUT+ [power]: K_BYPASS_O.O2 TO_PREAMP.1
PREAMP1_OUT- [power]: K_BYPASS_O.O1 TO_PREAMP.5
PWM: JP3.7 JP4.7 Q3.G
PWM2: JP3.8 JP4.8 Q4.G
PWM_EXT: PCB2.12 U$1.7 U$5.7
PWM_EXT2: PCB2.10 U$1.8 U$5.8
PWM_TFT: PCB2.13 U$3.LITE
RIAA_IN+ [power]: RCA_IN_3.TIP RIAA.2
RIAA_OUT+ [power]: IN5.P1 RIAA.1
RIAA_OUT- [power]: IN5.P2 RIAA.5
RL1: C4.2 K5.2 RL_DR1.15
RL2: C6.2 K3.2 RL_DR1.14
RL3: C13.2 K7.10 RL_DR1.13
RL4: C2.2 K4.10 RL_DR1.12
RL5: C5.2 K1.10 RL_DR1.11
RO_ASYM: C34.2 C35.2 K_ASS1.10 K_ASS2.10 RL_DR.18
RO_OUT: C36.2 K_OUT_SEL.10 LED_DR.11 RLED8.1
RS_ASYM: C17.2 K_ASS.10 RL_DR.11
RS_BYPASS: C18.1 C19.2 K_BYPASS_I.10 K_BYPASS_O.10 RL_DR.12
RS_IN1: C16.1 C30.1 IN1A.10 IN1B.10 RL_DR.13
RS_IN2: C12.1 C29.1 IN2A.10 IN2B.10 RL_DR.14
RS_IN3: C15.1 IN3.10 RL_DR.15
RS_IN4: C10.1 IN4.10 RL_DR.16
RS_IN5: C9.1 IN5.10 RL_DR.17
SCK: PCB2.52 U$1.5 U$3.SCK U$5.5
SCK1: DEMUX.12 JP3.5 JP4.5 VOLUME_BUS.5
SELECTED+ [power]: JP1.2 K_ASS.P2
SELECTED- [power]: JP1.4 K_ASS.P1
SW_ENC1: C32.2 PCB2.2 R27.1
SW_ENC2: C33.2 PCB2.3 R28.2
SW_PUSH: C31.2 PCB2.19 R6.1
TFT_CS: PCB2.11 U$3.CS
TFT_INT: PCB2.18 U$3.INT
TFT_RST: PCB2.8 U$3.RST
TFT_WAIT: PCB2.9 U$3.WAIT
TFT_X+: PCB2.A6 U$3.X+
TFT_X-: PCB2.A7 U$3.X-
TFT_Y+: PCB2.A9 U$3.Y+
TFT_Y-: PCB2.A8 U$3.Y-
TO_PREAMP+ [power]: JP1.1 K_BYPASS_I.P1
TO_PREAMP- [power]: JP1.5 K_BYPASS_I.P2
V_RECT [power]: C11.+ GBU6D.+ LM323T.1 OPT_SW4.1
V_RECT1 [power]: K1.S1 U$1.1
V_RECT2 [power]: K1.S2 U$5.1
V_RECT_SEL [power]: K1.P1 K1.P2 OPT_SW4.2
VOL_CS: PCB2.6 U$1.4 U$5.4
VOL_CS1: JP3.4 JP4.4 VOLUME_BUS.4
VU_METER: C23.1 IC1.5 SJ8.1 SJ9.1

## Tracks (layer width: path | path; a pad name or v marks a point on that pad's centre or on a via)
+5V
  Top 0.508: Q1.S 18.03,16 21.59,12.45 22.35,12.45 R3.1 22.61,12.45 35.56,12.45 37.85,14.73 PCB2.AREF 38.1,14.99 41.66,18.54 41.66,31.5 R22.1 41.4,31.75 38.61,31.75 | Q2.S 32.26,67.82 28.96,71.12 28.7,71.12 R26.1 | 38.61,31.75 32,31.75 28.19,35.56 23.37,35.56 R21.1 | 38.61,31.75 38.61,46.48 41.4,49.28 R23.1 | C6.1 197.87,59.44 197.87,55.88 199.14,54.61 K3.1 | U$3.VIN 180.34,68.07 180.34,63.5 176.53,59.69 C4.1 176.53,59.44 176.53,55.63 177.55,54.61 K5.1 176.53,55.37 174.24,55.37 161.04,42.16 156.46,42.16 LM323T.3 | C1.1 130.3,47.75 132.33,49.78 RL_DR1.10 132.59,49.78 136.91,49.78 149.86,36.83 149.99,36.7 | 149.99,36.7 151.13,37.85 C5.1 | 149.99,36.7 149.86,36.58 149.86,34.04 K1.1 149.61,33.78 143.26,27.43 143.26,25.15 C14.+ 143,24.89 143,20.07 142.24,19.3 C8.1 | 92.71,37.85 91.19,36.32 91.19,35.81 LED_DR2.10 | 92.71,37.85 C3.1 92.71,37.85 | 92.58,56.01 93.47,56.9 C7.1 | 92.58,56.01 91.44,54.86 LED_DR1.10 | 92.71,37.85 92.71,55.88 92.58,56.01 | PCB2.5V. 108.2,14.73 110.49,14.73 PCB2.5V.. | 130.56,23.11 130.56,20.83 K7.1 | 130.56,23.11 131.83,24.38 C13.1 | K7.P2 138.18,15.49 140.97,15.49 141.48,14.99 R31.2 | 130.56,23.11 125.48,23.11 124.21,24.38 121.16,24.38 C2.1 120.9,24.64 118.36,27.18 118.36,29.97 J1.1 | SERIAL_COM.4 78.99,3.3 81.79,3.3 83.06,4.57 90.42,4.57 91.69,3.3 SERIAL_COM1.4 91.95,3.05 113.28,3.05 IR_LED_OUT.A
  Bottom 0.508: 52.45,58.55 52.32,58.67 52.32,62.99 PCB2.5V | 52.45,58.55 65.79,45.21 65.79,43.18 IR1.VS 66.04,42.93 68.83,40.13 86.87,40.13 89.15,37.85 92.71,37.85 C3.1 92.96,37.85 92.96,29.46 107.44,14.99 107.95,14.99 PCB2.5V. | Q2.S 32.26,67.56 32.26,58.67 41.4,49.53 R23.1 41.66,49.53 50.55,58.42 52.32,58.42 52.45,58.55 | C6.1 197.61,59.69 194.31,59.69 191.77,62.23 186.44,62.23 180.59,68.07 U$3.VIN | LM323T.3 156.21,41.91 155.19,40.89 155.19,40.64 152.65,38.1 151.38,38.1 C5.1 | 111.89,13.59 110.74,14.73 PCB2.5V.. | 111.89,13.59 115.06,10.41 115.06,8.64 113.54,7.11 113.54,3.05 IR_LED_OUT.A | 120.78,19.43 119.38,20.83 K4.1 119.13,20.83 112.01,13.72 111.89,13.59 | 120.78,19.43 124.46,15.75 126.75,15.75 K4.P2 | C2.1 120.9,24.38 120.9,19.56 120.78,19.43 | 142.24,14.99 141.73,14.99 R31.2 142.24,14.99 | 142.24,14.99 144.78,14.99 148.84,19.05 151.38,19.05 OPT_SW4.3 | 142.24,14.99 142.24,19.05 C8.1 | K7.1 130.56,20.57 133.1,20.57 137.92,15.75 K7.P2
+5V1  (via drill 0.4)
  Top 0.381: R_DEMUX.1 322.45,14.35 324.36,12.45 RARR4.1 | IN1A.1 405.76,32.51 402.08,28.83 398.14,28.83 C30.2 398.02,28.96 398.02,30.23 391.16,37.08 C16.2 391.16,37.34 391.16,38.48 | 378.46,39.88 378.46,38.48 | 378.46,38.48 378.46,37.34 C12.2 | 378.46,39.88 379.6,41.02 IN2A.1 | 391.16,38.48 391.16,39.88 392.3,41.02 IN1B.1 | 378.46,38.48 378.59,38.48 391.03,38.48 391.16,38.48 | C15.2 353.19,37.21 353.19,39.75 354.33,40.89 IN3.1 | 378.46,39.88 378.33,39.88 368.17,39.88 367.03,41.02 IN2B.1 | 256.79,38.73 256.79,40.13 257.94,41.28 K_ASS2.1 | 256.79,38.73 256.79,37.59 C34.1 | 245.36,37.34 247.78,37.34 C27.1 247.9,37.47 249.17,38.73 256.67,38.73 256.79,38.73 | 245.36,37.34 C36.1 243.97,37.21 v241.68,34.93 | K_OUT_SEL.1 245.36,37.47 245.36,37.34 | C10.2 332.49,27.3 329.06,23.88 327.41,23.88 324.36,20.83 322.58,20.83 RL_DR.10 322.33,20.83 321.56,20.83 320.29,22.1 v319.91,22.1 | C22.2 288.42,31.24 286.13,28.96 286.13,28.45 LED_DR.10 286,28.32 276.1,28.32 269.62,21.84 245.36,21.84 241.17,26.04 241.17,26.29 LM323T1.3 | K_BYPASS_O.1 278.38,41.4 281.43,41.4 282.7,42.67 285.12,42.67 290.19,37.59 C18.2 | DEMUX.9 299.08,18.41 299.72,18.41 301.5,20.19 301.5,31.11 C21.2 | C9.2 315.21,37.34 311.91,37.34 310.77,38.48 303.91,38.48 303.02,37.59 C17.1 302.89,37.72 297.94,42.67 295.27,42.67 294,41.4 291.59,41.4 K_BYPASS_I.1 | IN5.1 317.12,41.15 312.17,41.15 310.9,42.42 306.45,42.42 305.44,41.4 304.29,41.4 K_ASS.1 | 370.59,18.92 370.59,20.07 370.08,20.57 C26.2 | 370.59,18.92 Q4.S | R29.1 364.74,17.65 365.25,17.65 366.52,18.92 370.46,18.92 370.59,18.92 | R32.1 379.1,17.65 381.76,14.99 C25.+ 382.02,14.86 388.11,8.76 VOLUME_BUS.1
  Top 0.381: v337.57,32.26 336.55,31.24 333.63,31.24 IN4.1
  Bottom 0.381: 365.76,39.88 365.76,37.34 C29.2 365.76,37.08 365.76,32.89 370.84,27.81 370.84,26.92 IC1.6 370.97,26.8 370.97,25.91 369.82,24.76 369.82,20.83 369.95,20.7 C26.2 370.08,20.57 374.27,20.57 R32.1 | 365.76,39.88 366.9,41.02 IN2B.1 | IN3.1 354.46,40.89 357,40.89 358.01,39.88 365.63,39.88 365.76,39.88 | R_DEMUX.1 322.33,14.48 320.42,16.38 320.42,18.03 C20.2 320.29,18.16 320.29,19.56 319.91,19.94 v319.91,22.1 | C19.1 277.11,37.59 277.11,40.13 278.26,41.28 K_BYPASS_O.1 | K_BYPASS_I.1 291.47,41.28 290.32,40.13 290.32,37.59 C18.2 290.19,37.34 288.54,35.69 288.54,31.37 C22.2 | C17.1 302.89,37.47 302.89,32.51 301.62,31.24 C21.2 | K_ASS.1 304.29,41.28 304.93,41.28 307.72,38.48 314.07,38.48 315.21,37.34 C9.2 315.47,37.08 320.04,32.51 327.15,32.51 328.42,31.24 333.5,31.24 IN4.1 332.61,31.11 332.61,27.43 C10.2 | 234.06,34.8 234.06,33.66 C28.+ 233.93,33.53 233.93,32.64 232.92,31.62 232.92,30.61 237.11,26.42 241.05,26.42 LM323T1.3 | 232.54,36.32 231.52,37.34 C35.1 | 232.54,36.32 234.06,34.8 | Q3.S 364.36,13.08 364.36,17.14 364.74,17.53 R29.1 | v337.57,32.26 337.57,32.77 340.61,35.81 351.79,35.81 353.06,37.08 C15.2 | K_ASS1.1 232.66,41.28 232.66,36.45 232.54,36.32 | v241.68,34.93 234.19,34.93 234.06,34.8
+5V_RAW1
  Bottom 0.381: LM323T1.1 246.25,26.29 246.25,18.54 264.16,0.64 350.52,0.64 JP3.1 353.19,3.3 353.19,8.89 JP4.1
BYPASS+
  Top 0.381: K_BYPASS_O.S2 270.76,48.9 275.97,48.9 277.11,47.75 290.32,47.75 291.47,48.9 K_BYPASS_I.S1
BYPASS-
  Top 0.381: K_BYPASS_O.S1 278.38,49.02 283.85,49.02 K_BYPASS_I.S2
EARTH
  Top 1.27: X1.2 197.87,4.83 197.87,15.75 X2.2 | 216.79,30.86 217.17,30.48 217.17,20.32 213.87,17.02 211.84,17.02 X11.2 | 216.79,30.86 212.6,35.05 211.84,35.05 X3.2 | 6V_TRF_PRIM.2 211.84,53.59 214.12,53.59 217.17,50.55 217.17,31.24 216.79,30.86
  Bottom 1.27: X4.2 179.07,4.83 179.07,15.49 X5.2 178.82,16.51 178.82,18.03 177.04,19.81 177.04,22.1 | X11.2 211.58,16.76 209.3,16.76 201.42,8.89 201.17,8.89 197.87,5.59 197.87,4.83 X1.2 | 177.04,22.1 177.04,24.13 R1.2 | 177.04,22.1 177.55,22.1 193.8,22.1 197.61,18.29 197.61,16 X2.2
EARTH1
  Top 0.203: X_OUT_1.G 260.1,61.09 273.94,61.09 278.89,66.04 T1.P 290.96,66.04 296.67,71.75 347.85,71.75 352.81,66.8 | 352.81,66.8 371.09,66.8 373,64.9 380.62,64.9 382.52,66.8 X_IN_1.G | 352.81,66.8 352.17,66.8 X_IN_2.G 352.81,66.8
GND  (via drill 0.4)
  Top 0.508: U$5.3 38.35,2.03 38.35,7.87 U$1.3 | C31.1 20.32,43.18 26.16,43.18 SW2.D | 44.2,40.64 44.2,42.93 C33.1 44.2,43.18 44.2,43.69 51.31,50.8 54.1,50.8 v57.91,54.61 | 44.2,40.64 44.2,38.35 C32.1 | 44.2,40.64 40.89,40.64 SW2.C | LED_DR1.9 100.33,54.86 98.3,56.9 C7.2 | LED_DR2.9 100.33,35.81 98.3,37.85 98.04,37.85 C3.2 98.55,37.85 98.55,53.34 100.08,54.86 LED_DR1.9 | PCB2.GND... 108.2,57.91 110.49,57.91 PCB2.GND.... 110.74,57.91 121.92,46.74 122.05,46.61 | 124.21,48.77 125.22,47.75 C1.2 | 124.21,48.77 123.19,49.78 RL_DR1.9 | GBU6D.- 147.32,13.21 147.32,19.05 C8.2 147.07,19.3 145.8,20.57 145.8,24.89 C14.- | LM323T.2 153.92,41.91 153.92,41.4 155.96,39.37 156.72,39.37 160.02,36.07 160.02,25.91 161.54,24.38 R1.1 | v104.14,54.61 100.58,54.61 LED_DR1.9 | SERIAL_COM.3 76.45,3.05 77.72,1.78 87.88,1.78 89.15,3.05 SERIAL_COM1.3 | 124.21,48.77 122.05,46.61 | 122.05,46.61 118.36,42.93 J1.6 118.36,42.67 118.36,42.16 124.71,35.81 C11.-
  Bottom 0.508: 30.99,42.93 38.35,42.93 40.64,40.64 SW2.C | 30.99,42.93 26.42,42.93 SW2.D | 30.99,42.93 30.99,32.77 31.5,32.26 31.5,13.97 32.26,13.21 32.51,13.21 37.59,8.13 38.1,8.13 U$1.3 | 58.04,54.74 54.86,57.91 54.86,62.99 PCB2.GND.. 55.12,62.99 57.15,62.99 PCB2.GND. | 58.04,54.74 68.33,44.45 68.33,43.18 IR1.GND 68.58,42.93 68.83,42.67 89.92,42.67 94.74,37.85 97.79,37.85 C3.2 | v57.91,54.61 58.04,54.74 | R1.1 161.54,24.13 161.54,20.57 156.72,15.75 149.86,15.75 147.32,13.21 GBU6D.- 147.07,12.95 138.68,4.57 138.68,2.79 | 154.05,44.32 153.92,44.2 153.92,42.16 LM323T.2 | 154.05,44.32 177.8,68.07 U$3.GND | 138.68,2.79 138.68,2.03 PWR_LED.3 | v104.14,54.61 104.65,54.61 107.95,57.91 PCB2.GND... | 123.57,2.67 123.7,2.79 131.06,2.79 132.08,1.78 OPT_SW1.2 132.33,1.78 133.35,2.79 138.68,2.79 | 123.57,2.67 122.68,1.78 OPT_SW3.2 | C1.2 128.27,44.45 153.92,44.45 154.05,44.32 | SERIAL_COM1.3 89.41,3.05 89.92,3.05 91.44,1.52 118.11,1.52 119.38,2.79 123.44,2.79 123.57,2.67
  pour Top: 162.05,-0.25 7.11,-0.25 7.11,74.72 162.05,74.72
  pour Bottom: 162.05,73.45 7.6,73.45 7.6,-0.25 162.05,-0.25
GND1  (via drill 0.4)
  Top 0.381: 363.6,21.97 364.87,20.7 C26.1 365,20.83 368.43,20.83 370.46,22.86 380.62,22.86 380.75,22.86 | 363.6,21.97 363.47,22.1 363.47,24.26 IC1.4 | R30.2 363.47,21.84 363.6,21.97 | 380.75,33.4 375.92,33.4 C24.- | 380.75,33.4 381.89,33.4 R24.2 | 380.75,22.86 380.75,33.27 380.75,33.4 | 380.75,22.86 380.75,22.61 381.76,21.59 381.76,20.07 C25.- 382.02,19.94 393.19,8.76 VOLUME_BUS.3 | SJ3.1 331.98,17.78 329.31,17.78 SJ2.1 329.18,17.78 326.52,17.78 SJ1.1 326.26,17.78 324.49,17.78 v324.1,17.4 | JP3.3 358.14,8.89 JP4.3 | 300.36,17.78 306.58,24 306.58,31.11 C21.1 306.45,31.24 305.31,32.39 300.99,32.39 298.2,29.59 295.53,29.59 295.4,29.46 | 300.36,17.78 299.72,17.14 299.08,17.14 DEMUX.10 | 295.4,29.46 295.4,28.45 LED_DR.9 | 295.4,29.46 293.62,31.24 C22.1 | RL_DR.9 313.18,20.7 313.18,20.19 315.21,18.16 C20.1 315.47,18.03 316.61,16.89 320.93,16.89 322.45,18.41 v322.71,18.41 | v301.5,16.64 300.48,17.65 300.36,17.78 | v245.87,30.35 247.78,32.26 C27.2 | v339.34,20.45 337.19,20.45 v334.39,17.65
  Bottom 0.381: 358.14,20.45 358.14,20.83 R30.2 | 358.14,20.45 358.14,9.02 JP4.3 | 301.5,16.51 313.69,16.51 315.21,18.03 C20.1 | 301.5,16.51 265.43,16.51 249.81,32.13 247.9,32.13 C27.2 | C28.- 234.19,30.99 239.14,30.99 243.71,26.42 LM323T1.2 242.95,27.43 v245.87,30.35 | v301.5,16.64 301.5,16.51 | v322.71,18.41 323.72,17.4 v324.1,17.4 323.72,17.65 v334.39,17.65 | v339.34,20.45 358.01,20.45 358.14,20.45
GND_AUDIO  (via drill 0.4, 0.6)
  Top 0.381: K_ASS.S1 304.17,49.02 299.72,53.47 299.72,58.8 JP1.3 | 262,28.45 264.29,28.45 264.41,28.32 TO_PREAMP.3 | 262,28.45 255.78,28.45 POT1.1 255.65,28.7 245.24,28.7 242.95,30.99 | 262,28.45 262,28.57 262,37.59 R25.1 262,37.85 262,41.02 268.73,47.75 268.73,52.07 274.45,57.79 279.02,57.79 281.05,59.82 281.05,60.07 RIAA.3 | IC1.2 363.35,29.46 361.7,29.46 R30.1 359.03,32.13 357.89,32.13 356.36,32.13 351.92,36.58 351.92,47.24 351.92,47.37 | 242.95,30.99 241.11,32.83 | 241.11,32.83 235.2,38.73 235.2,43.94 232.79,46.36 K_ASS1.P1 | 351.92,47.37 353.19,47.37 354.33,48.51 IN3.S1 | 351.92,47.37 345.57,47.37 337.06,38.86 333.63,38.86 IN4.S1 | PWR2.2 313.69,3.56 315.72,5.59 324.61,5.59 326.77,3.43 329.56,3.43 337.06,10.92 337.06,12.07 340.49,15.49 VOLUME_OUT.2 | v223.27,67.56 223.27,64.64 223.39,64.52 v229.36,58.55 | v240.54,32.26 241.05,32.77 241.11,32.83 | v239.01,24.13 239.01,27.05 242.82,30.86 242.95,30.99 | v333.12,50.16 333.12,47.24 v334.26,46.1
  Bottom 0.381: RIAA.3 281.18,60.07 281.18,59.82 284.35,56.64 297.69,56.64 299.72,58.67 299.72,58.8 JP1.3 | IN3.S1 354.46,48.64 355.85,50.04 360.55,50.04 361.82,48.77 366.9,48.77 IN2B.S1 367.03,48.9 368.17,50.04 380.87,50.04 382.14,48.77 382.78,48.77 | 382.78,48.77 384.68,48.77 IN1B.S2 | 338.58,29.97 335.66,32.89 335.66,35.05 | 338.58,29.97 340.36,28.19 TO_VOLUME.3 | 335.66,35.05 335.66,36.7 335.53,36.83 | 335.53,36.83 333.63,38.73 IN4.S1 | 319.09,35.88 315.34,39.62 307.47,39.62 306.58,40.51 306.58,46.61 304.29,48.9 K_ASS.S1 | 319.09,35.88 319.91,35.05 335.53,35.05 335.66,35.05 | VOLUME_OUT.2 340.49,15.49 338.45,17.53 338.45,29.84 338.58,29.97 | PWR.2 296.16,6.6 298.2,4.57 309.63,4.57 310.64,5.59 311.66,5.59 313.69,3.56 PWR2.2 | PWR1.2 400.56,24.38 397,27.94 | 397,27.94 385.06,39.88 383.54,39.88 382.78,40.64 382.78,48.64 382.78,48.77 | K_ASS1.P1 232.66,46.48 229.49,49.66 229.36,49.78 v229.36,58.55 | v320.55,37.34 319.15,35.94 319.09,35.88 | v239.01,24.13 v227.71,12.83 | v380.11,12.83 381.89,12.83 396.88,27.81 397,27.94 | v334.26,46.1 334.26,43.18 335.66,41.78 335.66,36.96 335.53,36.83 | v333.12,50.16 v333.12,57.28
  other vias: 381.38,6.48
  pour Top: 220.73,73.66 411.23,73.66 411.23,-0.51 220.73,-0.51
  pour Bottom: 219.84,73.66 411.23,73.66 411.23,-0.51 219.84,-0.51
GND_IN_RIAA
  Top 0.381: RCA_IN_3.SLEEVE1 302.64,64.26 297.56,69.34 RCA_IN_3.SLEEVE2 297.56,69.21 292.61,64.26 RCA_IN_3.SLEEVE
  Bottom 0.381: RIAA.4 283.72,60.07 283.72,60.33 287.66,64.26 292.48,64.26 RCA_IN_3.SLEEVE
GND_OUT_ASSYM
  Top 0.381: RCA_OUT_1.SLEEVE 230.38,64.26 235.33,69.21 RCA_OUT_1.SLEEVE2 235.46,69.21 240.41,64.26 RCA_OUT_1.SLEEVE1
  Bottom 0.381: K_ASS1.S1 232.54,49.02 230.25,51.31 230.25,64.13 RCA_OUT_1.SLEEVE
GND_OUT_SYM
  Top 0.381: K_ASS1.O1 232.66,43.82 231.39,43.82 228.47,40.89 228.47,28.83 226.57,26.92 226.31,26.92 JP2.2
  Top 0.406: X_OUT_1.1 261.87,57.91 231.65,57.91 229.11,55.37 229.11,46.1 231.39,43.82
IN_SYM+
  Top 0.381: IN4.S2 325.88,38.86 319.28,45.47 319.28,46.74 317.25,48.77 IN5.S1 | IN3.S2 346.71,48.51 345.31,48.51 339.47,42.67 329.95,42.67 326.14,38.86 IN4.S2 | K_ASS.O2 296.67,43.82 298.2,43.82 302.39,39.62 324.87,39.62 IN4.S2 | IN2A.S1 379.73,48.64 383.41,44.96 393.57,44.96 398.27,40.26 IN1A.S2
  Bottom 0.381: K_ASS.O2 296.67,43.94 298.58,45.85 298.58,46.99 296.67,48.9 K_ASS.S2 | IN2A.S1 379.6,48.64 376.94,48.64 373.25,44.96 355.73,44.96 355.6,44.83 350.52,44.83 346.84,48.51 IN3.S2
IN_SYM-
  Top 0.381: K_ASS.O1 304.29,43.94 304.8,43.94 309.5,48.64 IN5.S2 309.75,48.77 312.17,48.77 315.98,52.58 355.47,52.58 359.28,48.77 IN2B.S2 | IN2A.S2 372.11,48.77 377.19,48.77 378.46,50.04 391.03,50.04 392.3,48.77 IN1B.S1
  Bottom 0.381: IN2A.S2 371.98,48.64 369.32,48.64 368.17,47.5 360.55,47.5 359.41,48.64 IN2B.S2 | IN1B.S1 392.43,48.64 397.38,48.64 405.76,40.26 IN1A.S1
IN_VOL+
  Top 0.381: TO_VOLUME.1 327.41,22.99 323.98,19.56 321.18,19.56 314.96,25.78 314.96,31.62 312.17,34.42 290.83,34.42 285.62,39.62 276.35,39.62
  Top 0.406: 276.35,39.62 268.48,39.62 266.45,41.66 266.45,43.05 269.75,46.36 270.61,46.36 K_BYPASS_O.P2
  Bottom 0.381: POT1.3 255.78,33.66 256.16,33.66 268.86,46.36 270.64,46.36 K_BYPASS_O.P2 270.76,46.36
IN_VOL-
  Top 0.381: TO_VOLUME.5 336.68,33.15 334.77,35.05 295.27,35.05 290.45,39.88 289.43,39.88 285.88,43.43 285.88,44.45 285.12,45.21 279.53,45.21 278.38,46.36 K_BYPASS_O.P1
  Bottom 0.406: R25.2 266.53,45.3 268.99,47.75 275.59,47.75 276.86,46.48 278.33,46.48 K_BYPASS_O.P1
IO22
  Top 0.254: LED_DR2.5 100.58,30.48 101.09,30.48 104.65,26.92 104.65,22.86 106.68,20.83 106.68,18.8 107.95,17.53 PCB2.22
IO23
  Top 0.254: LED_DR2.4 100.33,29.21 99.82,29.21 97.79,27.18 97.79,24.64 101.09,21.34 103.89,21.34 105.16,20.07 105.16,14.22 106.93,12.45 111.76,12.45 114.3,14.99 114.3,16.26 115.06,17.02 115.06,18.29 113.28,20.07 112.78,20.07 110.74,18.03 110.74,17.53 PCB2.23
IO24
  Top 0.254: LED_DR2.6 100.58,31.75 101.09,31.75 105.16,27.69 105.16,23.11 108.2,20.07 PCB2.24
IO25  (via drill 0.4)
  Top 0.254: v114.05,17.27 113.79,17.02 113.79,15.24 111.51,12.95 107.19,12.95 105.66,14.48 105.66,20.32 104.14,21.84 101.35,21.84 98.3,24.89 98.3,26.42 99.82,27.94 100.33,27.94 LED_DR2.3
  Bottom 0.254: v114.05,17.27 113.28,17.27 110.74,19.81 PCB2.25
IO26
  Top 0.254: LED_DR2.7 100.58,33.02 101.09,33.02 106.17,27.94 106.17,24.38 107.95,22.61 PCB2.26
IO27  (via drill 0.4)
  Top 0.254: v113.03,19.05 113.03,15.24 111.25,13.46 107.44,13.46 106.17,14.73 106.17,20.57 103.89,22.86 101.09,22.86 98.81,25.15 98.81,25.65 99.82,26.67 100.33,26.67 LED_DR2.2
  Bottom 0.254: v113.03,19.05 113.03,20.07 110.74,22.35 PCB2.27
IO28
  Top 0.254: LED_DR2.8 100.58,34.29 101.09,34.29 106.68,28.7 106.68,26.42 107.95,25.15 PCB2.28
IO29  (via drill 0.4)
  Top 0.254: v103.63,24.38 102.62,25.4 100.58,25.4 LED_DR2.1 | v103.63,20.32 103.63,19.81 104.14,19.3 104.14,14.48 106.68,11.94 112.01,11.94 114.81,14.73 114.81,16 115.57,16.76 115.57,20.07 110.74,24.89 PCB2.29
  Bottom 0.254: v103.63,20.32 v103.63,24.38
IO30
  Top 0.254: LED_DR1.1 100.58,44.45 100.58,37.34 106.68,31.24 106.68,29.46 107.95,28.19 107.95,27.69 PCB2.30
IO31
  Top 0.254: J1.2 118.11,32.51 115.57,32.51 110.74,27.69 PCB2.31
IO32
  Top 0.254: LED_DR1.2 100.58,45.72 101.09,45.72 103.63,43.18 103.63,35.05 107.95,30.73 107.95,30.23 PCB2.32
IO33
  Top 0.254: J1.3 118.11,35.05 115.57,35.05 110.74,30.23 PCB2.33
IO34
  Top 0.254: LED_DR1.3 100.58,46.99 101.09,46.99 104.14,43.94 104.14,36.58 107.95,32.77 PCB2.34
IO35
  Top 0.254: J1.4 118.11,37.59 115.57,37.59 110.74,32.77 PCB2.35
IO36
  Top 0.254: LED_DR1.4 100.58,48.26 101.09,48.26 104.65,44.7 104.65,38.61 107.95,35.31 PCB2.36
IO37
  Top 0.254: J1.5 118.11,40.13 115.57,40.13 110.74,35.31 PCB2.37
IO38
  Top 0.254: LED_DR1.5 100.58,49.53 101.09,49.53 105.16,45.47 105.16,40.64 107.95,37.85 PCB2.38
IO39  (via drill 0.4)
  Top 0.254: v125.73,51.05 123.19,51.05 RL_DR1.8
  Bottom 0.254: v125.73,51.05 123.95,51.05 110.74,37.85 PCB2.39
IO40
  Top 0.254: LED_DR1.6 100.58,50.8 101.09,50.8 106.17,45.72 106.17,42.16 107.95,40.39 PCB2.40
IO41  (via drill 0.4)
  Top 0.254: v120.14,50.29 122.17,52.32 122.94,52.32 RL_DR1.7
  Bottom 0.254: v120.14,50.29 120.14,49.78 110.74,40.39 PCB2.41
IO42
  Top 0.254: LED_DR1.7 100.58,52.07 101.09,52.07 106.68,46.48 106.68,44.2 107.95,42.93 PCB2.42
IO43  (via drill 0.4)
  Top 0.254: v119.13,51.31 121.41,53.59 122.94,53.59 RL_DR1.6
  Bottom 0.254: v119.13,51.31 110.74,42.93 PCB2.43
IO44  (via drill 0.4)
  Top 0.254: v105.16,53.59 105.16,54.86 101.85,58.17 97.54,58.17 94.74,60.96 42.16,60.96 37.34,65.79 33.78,65.79 Q2.G | v104.39,51.56 104.39,49.53 107.95,45.97 107.95,45.47 PCB2.44
  Bottom 0.254: v105.16,53.59 105.16,52.32 v104.39,51.56
IO45  (via drill 0.4)
  Top 0.254: v120.14,54.86 122.94,54.86 RL_DR1.5
  Bottom 0.254: v120.14,54.86 110.74,45.47 PCB2.45
IO46  (via drill 0.4)
  Top 0.254: v37.59,64.26 23.37,64.26 18.54,59.44 18.54,53.34 11.68,46.48 11.68,35.81 14.99,32.51 14.99,27.69 16.51,26.16 16.51,18.03 Q1.G
  Bottom 0.254: v37.59,64.26 41.4,64.26 41.66,64.52 60.2,64.52 61.21,63.5 61.21,61.98 57.4,58.17 57.4,56.39 68.58,45.21 98.81,45.21 102.11,41.91 102.62,41.91 107.95,47.24 107.95,47.75 PCB2.46
IO47  (via drill 0.4)
  Top 0.254: v118.87,56.13 122.94,56.13 RL_DR1.4
  Bottom 0.254: v118.87,56.13 110.74,48.01 PCB2.47
IO48
  Top 0.254: LED_DR1.8 100.58,53.34 104.14,53.34 106.93,50.55 107.95,50.55 PCB2.48
IO49  (via drill 0.4)
  Top 0.254: v117.6,57.4 122.94,57.4 RL_DR1.3
  Bottom 0.254: v117.6,57.4 110.74,50.55 PCB2.49
IR_IN
  Bottom 0.254: IR1.VO 63.25,42.93 63.25,19.3 59.94,16 59.94,14.99 PCB2.7
LED1  (via drill 0.4)
  Top 0.203: v274.7,38.1 274.7,32.39 275.34,31.75 276.23,31.75 277.24,32.77 278.51,32.77 RLED5.2 | v275.59,56.77 v275.59,50.29 | v271.78,65.91 275.46,69.6 275.46,70.99 276.73,72.26 375.16,72.26 376.81,70.61 LED_IN2B.K
  Bottom 0.203: LED_IN2.K 376.94,66.17 376.94,70.61 LED_IN2B.K | v274.7,38.1 274.7,40.13 277.37,42.8 279.65,42.8 280.29,43.43 280.29,49.4 279.4,50.29 v275.59,50.29 | v275.59,56.77 275.59,57.28 271.78,61.09 v271.78,65.91
LED3  (via drill 0.4)
  Top 0.203: LED_IN3.K LED_IN3B.K 341.38,61.09 v341.38,57.28 | v290.58,32.39 288.8,34.16 278,34.16 276.73,32.89 275.84,32.89 RLED4.2 | v296.16,35.94 310.9,35.94 311.28,35.56 322.83,35.56 324.99,37.72 327.28,37.72 v330.45,40.89
  Bottom 0.203: v290.58,32.39 292.61,32.39 v296.16,35.94 | v330.45,40.89 330.45,46.36 v341.38,57.28
LED4  (via drill 0.4)
  Top 0.203: LED_IN4B.K LED_IN4.K 322.45,61.21 294.39,61.21 286.89,53.72 286.89,52.07 v287.02,51.94
  Bottom 0.203: 286.89,52.07 286.89,51.94 | 286.89,51.94 286.89,44.58 285.12,42.8 282.96,42.8 281.94,41.78 281.94,38.99 280.16,37.21 280.16,32.89 279.02,31.75 275.34,31.75 274.19,32.89 272.92,32.89 RLED3.2 | v287.02,51.94 286.89,51.94
LED5  (via drill 0.4)
  Top 0.203: LED_IN5.K 308.48,70.61 308.48,66.29 LED_IN5B.K | v291.47,33.15 291.47,19.94 281.18,9.65 281.18,8.13 RLED2.2 | v300.61,42.8 303.15,45.34 305.44,45.34 307.72,47.62 307.72,60.07 v308.1,60.45
  Bottom 0.203: v291.47,33.15 291.47,33.66 v300.61,42.8 | v308.1,60.45 308.1,66.04 308.36,66.29 LED_IN5B.K
LED6  (via drill 0.4)
  Top 0.203: LED_OUT_XLR1.K 276.73,70.61 276.73,66.29 LED_OUT_XLR2.K | v271.27,69.34 271.27,67.06 v271.02,66.8 | v277.37,53.85 283.97,53.85 v287.66,50.16
  Bottom 0.203: RLED1.2 278.51,18.41 283.46,23.37 283.46,31.62 289.05,37.21 289.05,41.28 290.58,42.8 292.74,42.8 293.5,43.56 293.5,49.4 292.74,50.16 v287.66,50.16 | v271.27,69.34 273.69,71.75 274.57,71.75 275.72,70.61 276.61,70.61 LED_OUT_XLR1.K | v271.02,66.8 271.02,60.2 v277.37,53.85
LED7  (via drill 0.4)
  Top 0.203: LED_OUT_RCA1.K 246.13,70.36 246.13,66.17 LED_OUT_RCA2.K 246.13,66.04 252.48,59.69 262.25,59.69 265.43,56.52 265.43,55.37 260.73,50.67 260.73,37.21 261.11,36.83 v261.11,35.43
  Bottom 0.203: v261.11,35.43 261.11,23.88 263.14,21.84 271.14,21.84 274.57,18.41 275.72,18.41 RLED7.2
LED8  (via drill 0.4)
  Top 0.203: LED_IN1.K 407.42,70.61 407.42,66.17 LED_IN1B.K | v284.35,29.97 281.43,32.89 RLED6.2 | v292.23,22.1 292.23,18.54 v296.67,14.1 | v337.31,14.73 339.34,16.76 353.82,16.76 v359.41,11.18
  Bottom 0.203: v292.23,22.1 v284.35,29.97 | v296.67,14.1 311.02,14.1 313.94,11.18 324.87,11.18 325.63,11.94 325.63,13.08 327.28,14.73 v337.31,14.73 | v359.41,11.18 397.76,11.18 410.46,23.88 410.46,63.12 407.42,66.17 LED_IN1B.K
LED9
  Top 0.203: RLED8.2 273.05,8.26 273.05,11.05 264.92,19.18 226.31,19.18 JP2.5
LED_COMMON_1
  Top 0.508: Q2.D 35.05,67.82 38.35,71.12 38.61,71.12 R26.2 | LED_VOL4.A 53.59,36.32 53.59,44.7 LED_VOL5.A | LED_VOL6.A 50.04,52.83 44.2,58.67 LED_VOL7.A
  Bottom 0.508: LED_VOL1.A 36.32,19.05 37.08,19.05 40.13,22.1 43.94,22.1 LED_VOL2.A 44.2,22.35 50.04,28.19 LED_VOL3.A 50.29,28.45 50.29,34.8 51.56,36.07 53.34,36.07 LED_VOL4.A | Q2.D 35.05,67.56 36.07,66.55 36.07,62.23 LED_VOL8.A 36.32,61.98 37.08,61.98 40.13,58.93 43.94,58.93 LED_VOL7.A | LED_VOL5.A 53.34,44.96 53.34,49.78 50.29,52.83 LED_VOL6.A
LED_COMMON_2
  Top 0.508: R3.2 12.45,12.45 12.45,13.21 15.24,16 Q1.D | LED_VOL9.A 27.43,19.05 22.86,19.05 19.81,22.1 LED_VOL10.A | LED_VOL11.A 13.46,28.45 10.41,31.5 10.41,36.07 LED_VOL12.A 10.41,36.32 10.41,44.7 LED_VOL13.A 10.41,44.96 10.41,46.23 13.46,49.28 13.46,52.58 LED_VOL14.A
  Bottom 0.508: LED_VOL14.A 13.72,52.83 14.22,53.34 14.22,53.59 19.56,58.93 LED_VOL15.A 19.81,58.93 22.86,61.98 27.43,61.98 LED_VOL16.A | 15.62,26.29 13.72,28.19 LED_VOL11.A | 15.62,26.29 19.56,22.35 LED_VOL10.A | Q1.D 15.49,16.26 15.49,26.16 15.62,26.29
LED_PWM_5V  (via drill 0.4)
  Top 0.381: R29.2 354.58,17.53 357.25,17.53 361.7,13.08 Q3.D | 274.19,65.79 274.19,66.29 LED_OUT_XLR2.A 274.32,65.66 274.32,65.41 v275.46,64.26